# Altium PCB control.PcbDoc
Units mil, origin at the board's own origin, x right, y up, seen from the top; angles counter-clockwise.
Board outline 3832.2 x 2347 mil, 2 copper layers (Top Layer, Bottom Layer); 91 components, 66 nets, 337 pads, 189 vias.
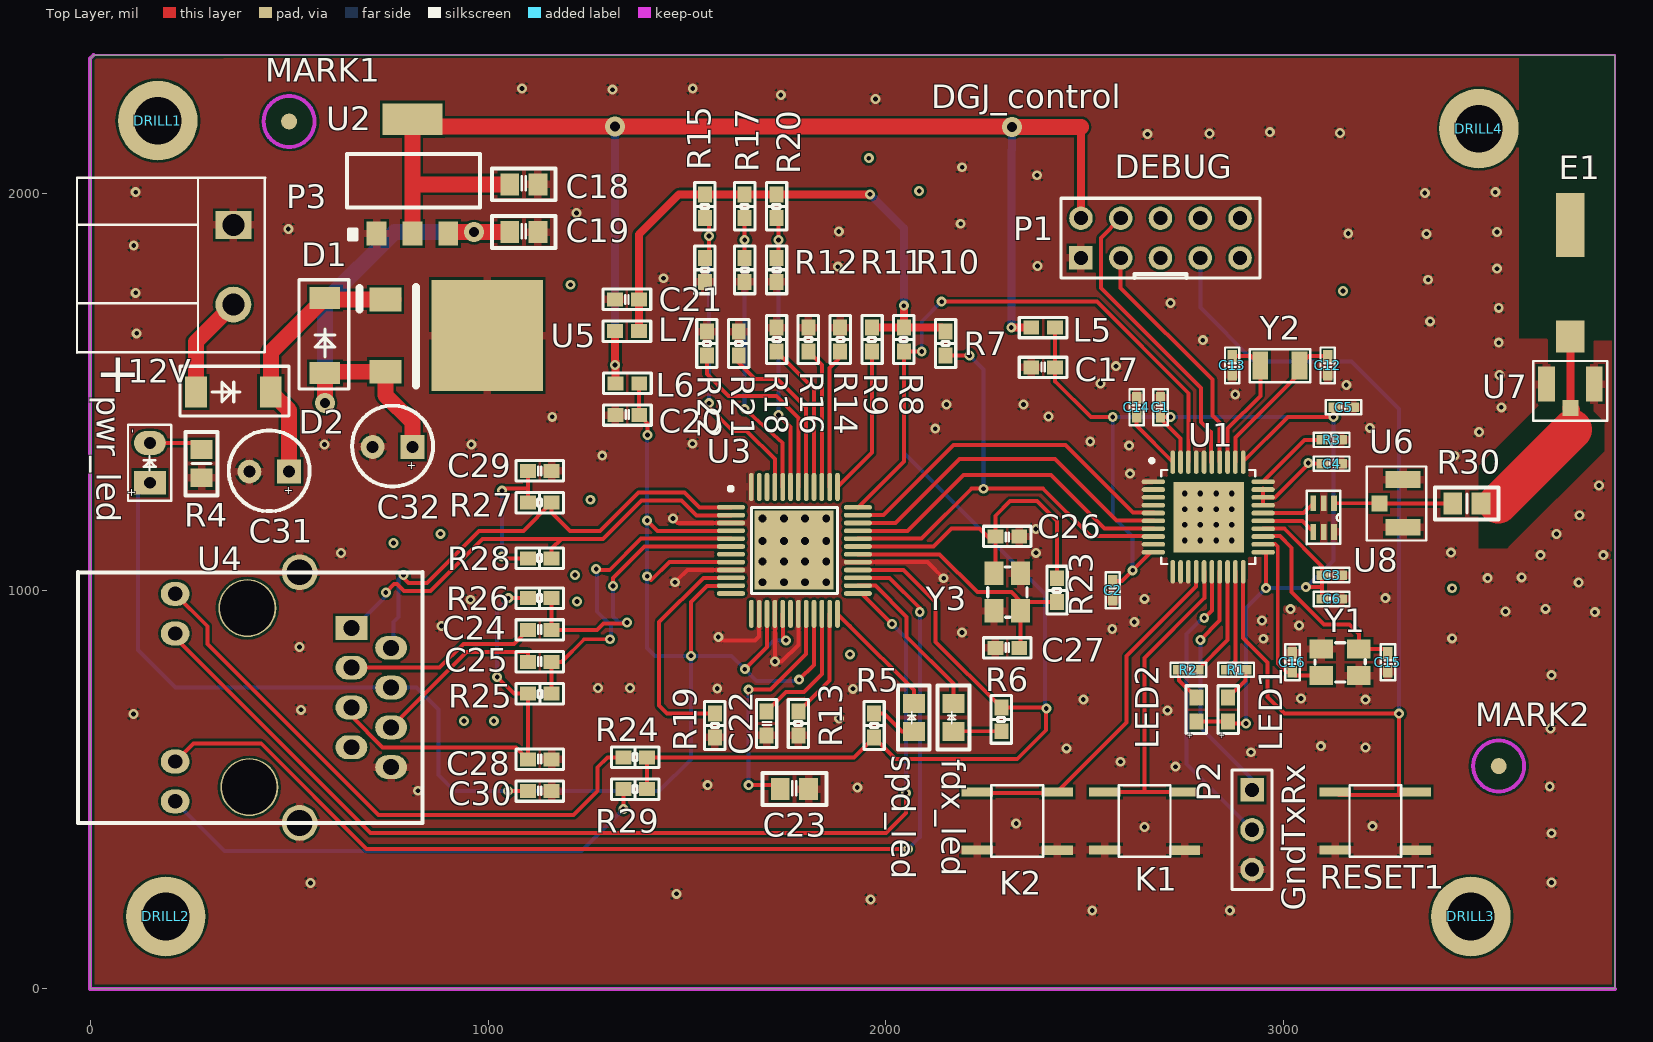
[diagram p0: Top Layer view]
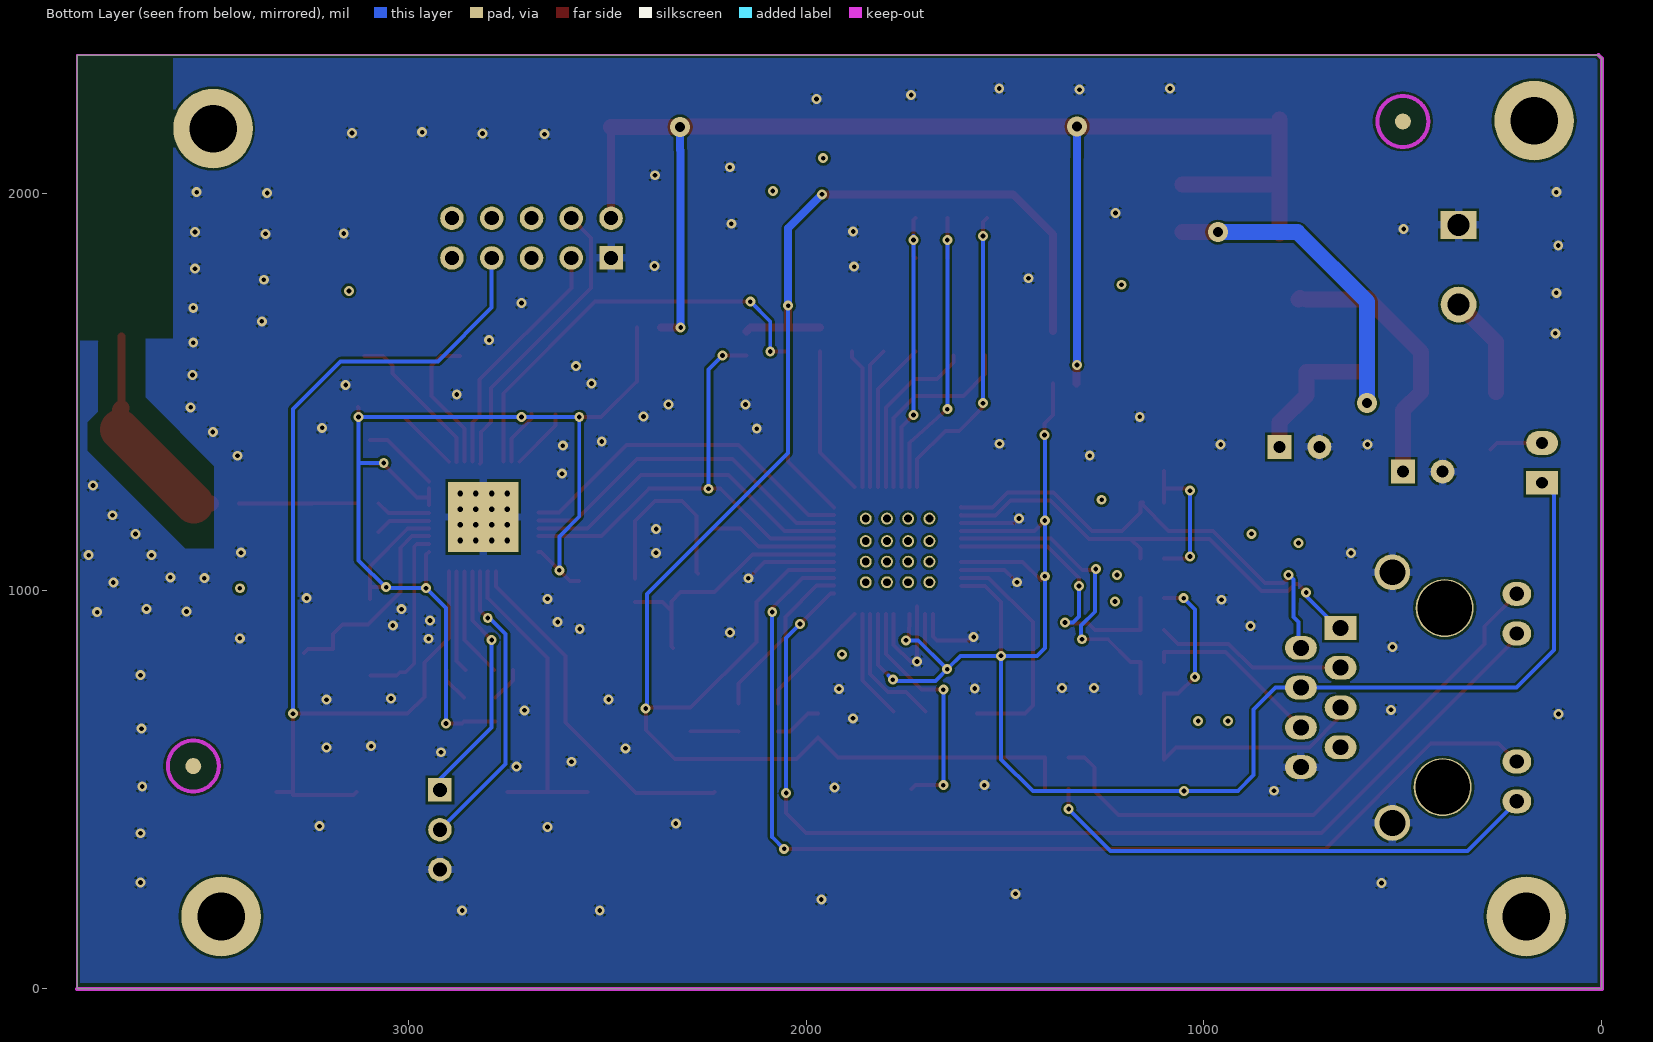
[diagram p1: Bottom Layer view, seen from below]

## Layer stack, top to bottom
Top Layer: signal copper 1.4
Dielectric: dielectric 12.6, FR-4, Dk 4.8
Bottom Layer: signal copper 1.4

## Board outline
3832.2,0 0,0 0,2338 9,2347 3832.2,2347

## Design rules (kind name [scope] priority, off if disabled: settings)
Clearance [All] p1: gap=6
DiffPairsRouting [All] p1: maxlimit=10 minlimit=10 mostfreqgap=10 maxuncoupledlength=100
HoleToHoleClearance [All] p1: gap=20 allowstackedmicrovias=TRUE
PlaneConnect [All] p1: planeconnectstyle=Relief reliefexpansion=20 reliefentries=4 reliefconductorwidth=20 reliefairgap=20
PolygonConnect [All] p1: connectstyle=Relief reliefconductorwidth=20 reliefentries=4 polygonreliefangle="90 Angle"
RoutingVias [All] p1: holewidth=12 width=25 viastyle="Through Hole" minholewidth=12 minwidth=25 maxholewidth=25 maxwidth=50
SilkscreenOverComponentPads [All] p1: minsilkscreentomaskgap=10
SolderMaskExpansion [All] p1: expansion=4
Width [All] p1: maxlimit=100 minlimit=10 preferedwidth=10
24 further rules are at their usual default settings.

## Classes and differential pairs
component class U_control: C1 C2 C3 C4 C5 C6 C12 C13 C14 C15 C16 C17 C18 C19 C31 C32 D1 D2 DRILL1 DRILL2 DRILL3 DRILL4 E1 K1 K2 L5 LED1 LED2 MARK1 MARK2 P1 P2 P3 R1 R2 R3 R30 RESET1 U1 U2 U5 U6 U7 U8 Y1 Y2
component class U_w5500: C20 C21 C22 C23 C24 C25 C26 C27 C28 C29 C30 fdx_led L6 L7 pwr_led R4 R5 R6 R7 R8 R9 R10 R11 R12 R13 R14 R15 R16 R17 R18 R19 R20 R21 R22 R23 R24 R25 R26 R27 R28 R29 spd_led U3 U4 Y3
differential pair TXO: +TXO_P -TXO_N
differential pair RF1: +RF1_P -RF1_N
differential pair RXI: +RXI_P -RXI_N
differential pair RD: +RD_P -RD_N

## Components (designator, comment, footprint, x,y, rotation, side; value= is the part's Value field where it differs from the comment)
C1 "0.1uF,0402" C0402 2690,1462 r270 top
C2 "0.1uF,0402" C0402 2570,1002 r90 top
C3 "0.1uF,0402" C0402 3120,1040 r180 top
C4 "0.1uF,0402" C0402 3120,1320 r180 top
C5 "220pF,0402" C0402 3150,1462 r180 top
C6 "0.1uF,0402" C0402 3120,980 r0 top
C12 "15pF,0402" C0402 3110,1567 r90 top
C13 "15pF,0402" C0402 2870,1567 r90 top
C14 "0.1uF,0402" C0402 2630,1462 r270 top
C15 "27pF,0402" C0402 3261.6,820.8 r90 top
C16 "27pF,0402" C0402 3021.6,820.8 r270 top
C17 "0.1uF,0603" C0603 2395,1562 r180 top
C18 "1uF,0805" C0805 1090,2022 r180 top
C19 "1uF,0805" C0805 1090,1902 r180 top
C20 "0.1uF,0603" C0603 1350,1442 r180 top
C21 "0.1uF,0603" C0603 1349,1733 r0 top
C22 "10nF,0603" C0603 1700,667 r90 top
C23 "4.7uF,0805" C0805 1770,502 r180 top
C24 "0.1uF,0603" C0603 1130,902 r180 top
C25 "0.1uF,0603" C0603 1130,822 r180 top
C26 "20pF,0603" C0603 2305,1137 r0 top
C27 "20pF,0603" C0603 2305,857 r180 top
C28 "0.1uF,0603" C0603 1130,577 r180 top
C29 "0.1uF,0603" C0603 1130,1302 r0 top
C30 "0.1uF,0603" C0603 1130,497 r180 top
C31 "220uF" CDIP2 500,1300 r180 top
C32 "220uF" CDIP2 810,1362 r180 top
D1 "M7" DO214AC 590,1642 r90 top
D2 "M7" DO214AC 360,1500 r0 top
DRILL1 "DRILL" DRILL_3MM 170,2182 r90 top
DRILL2 "DRILL" DRILL_3MM 190,182 r90 top
DRILL3 "DRILL" DRILL_3MM 3470,182 r90 top
DRILL4 "DRILL" DRILL_3MM 3490,2162 r90 top
E1 "2450AT42A100" BT_ANT_PCB 3720,1640 r90 top
fdx_led "0603_SMD" LED0805 2170,682 r90 top
K1 "KEY_SMT_4PIN" KEY-SMT 2650,422 r0 top
K2 "KEY_SMT_4PIN" KEY-SMT 2330,422 r0 top
L5 "1uH,0603" L0603 2395,1662 r0 top
L6 "1uH,0603" L0603 1350,1522 r0 top
L7 "1uH,0603" L0603 1349,1653 r0 top
LED1 "0603_SMD" LED0603 2860,702 r90 top
LED2 "0603_SMD" LED0603 2780,702 r90 top
MARK1 "MARK POINT" MARK_POINT 500,2180 r90 top
MARK2 "MARK POINT" MARK_POINT 3540,560 r90 top
P1 "DEBUG" HDR2X5 2690,1887 r90 top
P2 "GndTxRx" HDR1X3 2920,500 r270 top
P3 "12V" 2EDG-5.08-2P 360,1920 r270 top
pwr_led "DIP2" LEDDIP2 150,1322 r90 top
R1 "1k,0402" R0402 2880,802 r180 top
R2 "1k,0402" R0402 2760,802 r0 top
R3 "56k,0402" R0402 3120,1380 r180 top
R4 "1k,0805" R0805 280,1320 r270 top
R5 "510,0603" R0603 1970,662 r90 top
R6 "510,0603" R0603 2290,677.43 r270 top
R7 "10k,0603" R0603 2150,1622 r270 top
R8 "10k,0603" R0603 2045,1632 r270 top
R9 "10k,0603" R0603 1965,1632 r270 top
R10 "10k,0603" R0603 1725,1807 r90 top
R11 "10k,0603" R0603 1645,1807 r90 top
R12 "10k,0603" R0603 1545,1807 r90 top
R13 "10k,0603" R0603 1780,667 r270 top
R14 "10k,0603" R0603 1885,1632 r90 top
R15 "10k,0603" R0603 1545,1967 r270 top
R16 "10k,0603" R0603 1805,1632 r90 top
R17 "10k,0603" R0603 1645,1967 r270 top
R18 "10k,0603" R0603 1725,1632 r90 top
R19 "12.4k1%,0603" R0603 1570,662 r90 top
R20 "10k,0603" R0603 1725,1967 r270 top
R21 "10k,0603" R0603 1630,1622 r90 top
R22 "10k,0603" R0603 1550,1622 r90 top
R23 "1M,0603" R0603 2430,1002 r270 top
R24 "510,0603" R0603 1370,582 r180 top
R25 "49.9,0603" R0603 1130,742 r0 top
R26 "49.9,0603" R0603 1130,982 r180 top
R27 "49.9,0603" R0603 1130,1222 r180 top
R28 "49.9,0603" R0603 1130,1082 r180 top
R29 "510,0603" R0603 1370,502 r180 top
R30 "56k,0402" R0805 3460,1220 r0 top
RESET1 "KEY_SMT_4PIN" KEY-SMT 3230,422 r0 top
spd_led "0603_SMD" LED0805 2070,682 r90 top
U1 "CC2541F256" PQFP40 2810,1186 r0 top
U2 "AMS117-3.3V" SOT223 810,2042 r0 top
U3 "W5500" LQFP48 1770,1102 r0 top
U4 "RJ45,HR911105A" RJ45 485,732 r180 top
U5 "LM7805" SOT252 870,1642 r270 top
U6 "ipex" IPEX 3300,1280 r0 top
U7 "IPEX" IPEX 3660,1520 r90 top
U8 "2450BM15A002" 2450BM15A002 3100,1184.5 r270 top
Y1 "32.000MHz/SX-32" 3225 3141.6,820.8 r0 top
Y2 "32.768kHz" 1206 2990,1567 r0 top
Y3 "25.000MHz/SX-32" 3225 2305,997 r270 top

## Footprints (in the part's own frame and the unit in brackets; to place one, negate y for a bottom-side part, rotate by r counter-clockwise, add the part's x,y. Pads: shape width x height; smd on the part's side, far side on the other; paste and mask are expansions set on the pad)
2EDG-5.08-2P [mil]
  rect 70x90 hole 55: 1(0,0)
  round 90 hole 55: 2(200,0)
  silkscreen extent -119,-393 321,80
1206 [mm]
  rect 1x1.8 smd: 1(-1.25,0) 2(1.25,0)
  silkscreen extent -1.93,-1.07 1.93,1.04
2450BM15A002 [mil]
  rect 40x14 smd: 1(-36,26) 2(-36,0) 3(-36,-26) 4(36,-26) 5(36,0) 6(36,26)
  silkscreen extent -67,-42 67,42
3225 [mm]
  rect 1.5x1.2 smd: 1(-1.2,-0.85) 2(1.2,-0.85) 3(1.2,0.85) 4(-1.2,0.85)
  silkscreen extent -1.6,-1.25 1.6,1.25
BT_ANT_PCB [mil]
  rect 80x72 smd: 1(0,0)
  rect 160x72 smd: 2(280,0)
C0402 [mm]
  rect 0.75x0.6 smd: 1(-0.6,0) 2(0.6,0)
  silkscreen extent -1.14,-0.46 1.14,0.46
C0603 [mil]
  rect 40x35 smd: 1(-29.92,0) 2(29.92,0)
  silkscreen extent -60,-26 60,26
C0805 [mm]
  rect 1.2x1.4 smd: 1(-0.9,0) 2(0.9,0)
  silkscreen extent -2.03,-1.02 2.03,1.02
CDIP2 [mil]
  rect 60x60 hole 30: 1(0,0)
  round 60 hole 30: 2(100,0)
  silkscreen extent -52,-104 152,100
DO214AC [mil]
  rect 55x77 smd: 1(-94,0) 2(94,0)
  silkscreen extent -134,-60 140,65
DRILL_3MM [mil]
  round 200 hole 120: 1(0,0)
HDR1X3 [mm] "Connector; Header; 3 Position"
  rect 1.5x1.5 hole 0.9: 1(0,0)
  round 1.5 hole 0.9: 2(2.54,0) 3(5.08,0)
  silkscreen extent -1.27,-1.27 6.35,1.27
HDR2X5 [mm]
  rect 1.5x1.5 hole 0.9: 1(-1.27,5.08)
  round 1.5 hole 0.9: 2(1.27,5.08) 3(-1.27,2.54) 4(1.27,2.54) 5(-1.27,0) 6(1.27,0) 7(-1.27,-2.54) 8(1.27,-2.54) 9(-1.27,-5.08) 10(1.27,-5.08)
  silkscreen extent -2.54,-6.35 2.54,6.35
IPEX [mil]
  rect 40x40 smd: 1(-60,-60)
  rect 88x42 smd: 2(0,-120) 3(0,0)
  silkscreen extent -92,-153 58,33
KEY-SMT [mm]
  rect 2x0.6 smd: 1(-2.55,-1.85) 1(2.55,-1.87) 2(-2.55,1.85) 2(2.55,1.85)
  silkscreen extent -1.65,-2.29 1.65,2.29
L0603 [mil]
  rect 40x35 smd: 1(-29.92,0) 2(29.92,0)
  silkscreen extent -60,-26 60,26
LED0603 [mil]
  rect 40x35 smd: 1(-29.92,0) 2(29.92,0)
  silkscreen extent -60,-26 60,26
LED0805 [mm]
  rect 1.2x1.4 smd: 1(-0.9,0) 2(0.9,0)
  silkscreen extent -2.03,-1.02 2.03,1.02
LEDDIP2 [mil]
  rect 60x80 hole 30: 1(-50,0)
  oval 60x80 hole 30: 2(50,0)
  silkscreen extent -95,-54 96,55
LQFP48 [mm]
  oval 1.8x0.3 smd: 1(-4.05,2.75) 2(-4.05,2.25) 3(-4.05,1.75) 4(-4.05,1.25) 5(-4.05,0.75) 6(-4.05,0.25) 7(-4.05,-0.25) 8(-4.05,-0.75) 9(-4.05,-1.25) 10(-4.05,-1.75) 11(-4.05,-2.25) 12(-4.05,-2.75) 25(4.05,-2.75) 26(4.05,-2.25) 27(4.05,-1.75) 28(4.05,-1.25) 29(4.05,-0.75) 30(4.05,-0.25) 31(4.05,0.25) 32(4.05,0.75) 33(4.05,1.25) 34(4.05,1.75) 35(4.05,2.25) 36(4.05,2.75)
  oval 0.3x1.8 smd: 13(-2.75,-4.05) 14(-2.25,-4.05) 15(-1.75,-4.05) 16(-1.25,-4.05) 17(-0.75,-4.05) 18(-0.25,-4.05) 19(0.25,-4.05) 20(0.75,-4.05) 21(1.25,-4.05) 22(1.75,-4.05) 23(2.25,-4.05) 24(2.75,-4.05) 37(2.75,4.05) 38(2.25,4.05) 39(1.75,4.05) 40(1.25,4.05) 41(0.75,4.05) 42(0.25,4.05) 43(-0.25,4.05) 44(-0.75,4.05) 45(-1.25,4.05) 46(-1.75,4.05) 47(-2.25,4.05) 48(-2.75,4.05)
  round 0.762 hole 0.508: 49(-2.032,-2.032) 49(-2.032,-0.72) 49(-2.032,0.593) 49(-2.032,2.032) 49(-0.677,-2.032) 49(-0.677,-0.72) 49(-0.677,0.593) 49(-0.677,2.032) 49(0.677,-2.032) 49(0.677,-0.72) 49(0.677,0.593) 49(0.677,2.032) 49(2.032,-2.032) 49(2.032,-0.72) 49(2.032,0.593) 49(2.032,2.032)
  rect 5.06x5.06 smd: 49(-0.025,0.025)
  silkscreen extent -4.19,-2.75 2.75,4.06
MARK_POINT [mil]
  round 40 all layers, no hole paste+40 mask+40: 1(0,0)
  Keep-Out Layer circle w10: c0,0 r64.03
PQFP40 [mm]
  oval 1.5x0.3 smd paste+0 mask+0.051: 1(-3.5,2.25) 2(-3.5,1.75) 3(-3.5,1.25) 4(-3.5,0.75) 5(-3.5,0.25) 6(-3.5,-0.25) 7(-3.5,-0.75) 8(-3.5,-1.25) 9(-3.5,-1.75) 10(-3.5,-2.25) 21(3.5,-2.25) 22(3.5,-1.75) 23(3.5,-1.25) 24(3.5,-0.75) 25(3.5,-0.25) 26(3.5,0.25) 27(3.5,0.75) 28(3.5,1.25) 29(3.5,1.75) 30(3.5,2.25)
  oval 0.3x1.5 smd paste+0 mask+0.051: 11(-2.268,-3.5) 12(-1.768,-3.5) 13(-1.268,-3.5) 14(-0.768,-3.5) 15(-0.268,-3.5) 16(0.232,-3.5) 17(0.732,-3.5) 18(1.232,-3.5) 19(1.732,-3.5) 20(2.232,-3.5) 31(2.232,3.5) 32(1.732,3.5) 33(1.232,3.5) 34(0.732,3.5) 35(0.232,3.5) 36(-0.268,3.5) 37(-0.768,3.5) 38(-1.268,3.5) 39(-1.768,3.5) 40(-2.268,3.5)
  rect 0.762x0.762 hole 0.356 paste+0 mask+0: 41(-1.5,-1.5) 41(-1.5,-0.5) 41(-1.5,0.5) 41(-1.5,1.5) 41(-0.5,-1.5) 41(-0.5,-0.508) 41(-0.5,0.5) 41(-0.5,1.5) 41(0.516,-1.5) 41(0.516,-0.508) 41(0.516,0.5) 41(0.516,1.5) 41(1.5,-1.5) 41(1.5,-0.508) 41(1.5,0.5) 41(1.5,1.5)
  rect 4.5x4.5 smd paste+0 mask+0: 41(0.024,-0.024)
  rect 4.496x4.496 smd far side: 41(0.025,0)
  silkscreen extent -3.71,-3 3,3.71
R0402 [mm]
  rect 0.75x0.6 smd: 1(-0.6,0) 2(0.6,0)
  silkscreen extent -1.14,-0.46 1.14,0.46
R0603 [mil]
  rect 40x35 smd: 1(-29.92,0) 2(29.92,0)
  silkscreen extent -60,-26 60,26
R0805 [mm] "Chip Resistor, Body 2.0x1.2mm, IPC Medium Density"
  rect 1.2x1.4 smd: 1(-0.9,0) 2(0.9,0)
  silkscreen extent -2.03,-1.02 2.03,1.02
RJ45 [mil]
  round 145.67 hole 137.8: 0(85,225) 0(90,-225)
  rect 80x60 hole 40: 1(-171.46,-175.2)
  oval 80x60 hole 40: 2(-271.46,-125.2) 3(-171.46,-75.2) 4(-271.46,-25.2) 5(-171.46,24.8) 6(-271.46,74.8) 7(-171.46,124.8) 8(-271.46,174.8)
  oval 72x60 hole 36: 9(271.46,-260.83) 10(271.46,-161.2) 11(271.46,160.67) 12(271.46,260.8)
  round 90 hole 65: 13(-41.54,314.96) 13(-41.54,-314.96)
  silkscreen extent -350,-315 516,315
SOT223 [mil]
  rect 50x60 smd: 1(-90,-143.5) 2(0,-143.5) 3(90,-143.5)
  rect 150x80 smd: 2(0,143.5)
  silkscreen extent -165,-158 170,56
SOT252 [mil]
  rect 60x80 smd: 1(-91,-128) 3(91,-128)
  rect 280x280 smd: 2(0,128)
  silkscreen extent -122,-193 126,-51

## Part data
C1 C2 C3 C4 C5 C6 C12 C13 C14 C15 C16 C17 C18 C19 C20 C21 C22 C23 C24 C25 C26 C27 C28 C29 C30: library part CAP, "Capacitor"
C31 C32: library part E_CAP, "electric capacitor"
D1 D2: library part DIODE, "diode"
E1: library part BT_ANT_PCB
fdx_led LED1 LED2 spd_led: library part LED, "led"
K1 K2 RESET1: library part KEY, "key"
L5 L6 L7: library part Inductor, "Inductor"
MARK1 MARK2: library part MARK_POINT
P1: library part "Header 5X2", "Header, 5-Pin, Dual row"
P2: library part "Header 3", "Header, 3-Pin"
P3: library part 2EDG-5.08-2P
pwr_led: library part LED
R1 R2 R3 R4 R5 R6 R7 R8 R9 R10 R11 R12 R13 R14 R15 R16 R17 R18 R19 R20 R21 R22 R23 R24 R25 R26 R27 R28 R29 R30: library part Res1, "Resistor"
U1: library part CC254x, "TI cc2541F256"
U2 U5: library part VOLT_REG, "voltage regulator tube"
U4: library part HR911105A
U6: library part IPEX
Y1: library part CRYSTAL_5, "SPXO"
Y2: library part DA740C, "crystal"
Y3: library part CRYSTAL_5

## Via types
v1: diameter 25, hole 12, Top Layer to Bottom Layer, 185 vias
v2: diameter 50, hole 25, Top Layer to Bottom Layer, 4 vias

## Nets (pads, with @x,y where several pads share a name; then routed paths per layer and width w, separated by ;. In a path a pad name is that pad's centre, name@x,y a point inside that pad or via, vN(x,y) a via of type N, cw(c..) or ccw(c..) an arc to the next point about the centre after c; other vN are vias at no path point)
ACT_LED: U3.27 U4.11 | length 2774.6
  Top Layer w10: U4.11 259.21,617 430,617 695,352 v1(2055,352) ; U3.27 2008.9,1033.1 2085,957 v1(2085,947)
  Bottom Layer w10: v1(2055,352) 2085,382 v1(2085,947)
DC: P1.3 U1.34 | length 615.3
  Top Layer w10: P1.3 2590,1762 2820.8,1531.2 2820.8,1441.2 2838.81,1423.18 U1.34@2838.81,1324.8
DD: P1.4 U1.35 | length 753.5
  Top Layer w10: P1.4 2540,1887 2540,1762 2792,1510 2792,1424.3 2816.34,1399.96 2816.34,1322.58 U1.35@2819.13,1319.8
FDX_LED: fdx_led.2 U3.26 | length 421.5
  Top Layer w10: U3.26 1973.58,1013.42 2052,935 2052,885 2170,767 fdx_led.2
GND: C1.1 C2.1 C3.1 C4.1 C5.1 C6.2 C12.1 C13.1 C14.1 C15.1 C16.1 C17.2 C18.1 C19.1 C20.2 C21.1 C22.1 C23.1 C26.2 C27.2 C28.1 C29.2 C30.1 C31.2 C32.2 K1.1 K2.1 P1.1 P2.3 P3.1 R3.1 R4.2 R10.1 R11.1 R12.1 R13.2 R14.2 R16.2 R18.2 R19.1 R21.2 R22.2 RESET1.1 U1.1 U1.41 U2.1 U3.3 U3.9 U3.14 U3.16 U3.19 U3.29 U3.48 U4.8 U4.13 U5.2 U6.2 U6.3 U7.2 U7.3 U8.2 U8.5 U8.6 Y1.2 Y1.4 Y3.2 Y3.4 | length 995.4
  Top Layer w10: v1(1465,1182) 1476.1,1170.9 U3.3 ; v1@1475,1017 1475,1027 1500.79,1052.79 U3.9 ; v1(1578.8,884.4) 1587.5,875.7 1671.2,875.7 1681.42,885.92 U3.14 ; v1@1720.79,824.79 U3.16@1720.79,960.55 ; v1(1721,823) 1738,823 1779.84,864.84 U3.19 ; U3.29 2104.53,1072.47 v1(2145,1032)
  other v1: 2518.5,197.2 2864.2,197.2 1961.7,224.6 1473.7,239 554,266 3672.6,267.1 3672.6,391.1 2650,407 3223,409 2327.4,415.9 824,498 1928,506 3668.3,508.6 1552,512 2727.8,558.5 2589.2,570.8 2917.6,594.7 2453.7,604.7 3205.3,606.5 3093,610 3670.4,653.9 1882,680 108.9,691 2707.8,700.2 529.6,701.4 2496,727 3205.2,726.9 3043.2,729.8 1917.1,754.2 1576,755 1276.6,755.9 1357,756 3672.6,788.5 526,859 2948.4,880 3423,881 2191,896 2568.8,904.6 883.3,911.7 3038.5,913.2 2624.3,921.9 2945.2,925.8 3781.6,946.7 3557.2,948.8 3016.4,954.3 3657.6,955.2 956,978 2649.6,980.4 3255,982 1470,1022 3741,1021.5 3512.3,1032.2 3597.8,1034.3 3644.8,1089.9 3802.9,1089.9 630.5,1095.4 2377,1096 3420.4,1096.3 3685.4,1143.3 2376.6,1155.6 3743.1,1190.3 3792.2,1265.1 2613.3,1294.8 1287,1340 3429,1339.9 2611.2,1365.3 589,1368 958,1368 1514,1370 2513.4,1375.8 3490.9,1399.7 2123.9,1408 3216,1410 1161.3,1437.7 2408.3,1438.6 3546.5,1461.7 2152,1469 2346,1469 2877.9,1493.6 3157,1518 2539.5,1521.5 3542.2,1542.9 2578,1565 3540.1,1624.1 2796.4,1630.3 117,1647.6 3367.8,1677.7 3540.1,1711.7 2715.4,1724 114.5,1749.3 3362.7,1782.2 1441,1786 3535.8,1810 1879,1815 2380.8,1816.6 109.6,1868.3 3161.8,1898.2 3358.4,1897.6 3535.8,1901.9 1881.6,1903.3 498,1910 2187.8,1923 1222.4,1950.2 3354.2,2000.2 114.5,2002.3 3531.5,2002.4 2379.8,2044.9 2191.5,2064.9 2657.5,2148 2813.2,2150.1 3141.4,2151.1 2964.7,2153.2 1973.4,2236.7 1735.7,2246.6 1313.1,2259.8 1085.3,2263.1 1514.5,2263.1
INT: R8.2 U1.38 U3.36 | length 1517.9
  Top Layer w10: U3.36 2045,1325.82 R8.2 2070.08,1602.08 2070.16,1602 v1(2090,1602) ; v1(2140,1727) 2530,1727 2760.07,1496.93 U1.38@2760.07,1324.8
  Bottom Layer w10: v1(2090,1602) 2090,1677 v1(2140,1727)
KEY1: K1.2 U1.15 | length 818.4
  Top Layer w10: K1.2@2549.61,494.83 2647.83,494.83 ; K1.2@2750.39,494.83 2647.83,494.83 ; U1.15@2799.44,1049.2 2800,1048.65 2800,982 2650,832 2650,497 2647.83,494.83
KEY2: K2.2 U1.14 | length 906.2
  Top Layer w10: K2.2@2229.61,494.83 2232.44,492 K2.2@2427.56,492 ; U1.14@2779.76,1049.2 2779.76,1011.76 2605,837 2605,669.44 K2.2@2430.39,494.83 ; K2.2@2427.56,492 K2.2@2430.39,494.83 ; K2.2@2427.56,492 K2.2@2430.39,494.83
LED1: R1.2 U1.19 | length 272.9
  Top Layer w10: R1.2@2868.19,813.81 R1.2 2878.19,823.81 U1.19@2878.19,1049.2
LED2: R2.2 U1.18 | length 278.2
  Top Layer w10: R2.2 2858.5,876.88 U1.18@2858.5,1049.2
LINK_LED: U3.25 U4.10 | length 2677.3
  Top Layer w10: U4.10 213.54,883.46 705,392 2000,392 2050,442 v1(2050,492) ; U3.25 1938.27,993.73 v1(2015,917)
  Bottom Layer w10: v1(2015,917) 2050,882 v1(2050,492)
MISO: U1.6 U3.34 | length 873.6
  Top Layer w10: U3.34 2023.9,1170.9 2185,1332 2425,1332 2579.84,1177.16 U1.6@2672.2,1177.16
MOSI: U1.5 U3.35 | length 920.1
  Top Layer w10: U3.35@1963.2,1190.58 U3.35 1993.58,1190.58 2170,1367 2451.16,1367 2621.31,1196.84 U1.5@2672.2,1196.84
NetC12_2: C12.2 U1.32 Y2.2 | length 390.5
  Top Layer w10: U1.32 2878.19,1385.59 3039.21,1546.61 Y2.2 3062.83,1590.62 C12.2
NetC13_2: C13.2 U1.33 Y2.1 | length 356.9
  Top Layer w10: U1.33@2858.5,1324.8 2858.5,1408.3 2940.79,1490.59 Y2.1 2917.17,1590.62 C13.2
NetC14_2: C14.2 U1.40 | length 156.2
  Top Layer w10: C14.2@2630,1443.38 2630,1415.5 U1.40@2720.7,1324.8
NetC15_2: C15.2 U1.23 Y1.3 | length 522.6
  Top Layer w10: U1.23@2947.8,1137.79 2990.21,1137.79 3019.3,1108.7 3019.3,997.2 3100.8,915.7 3164.9,915.7 3188.84,891.76 Y1.3 3251.76,854.26 C15.2
NetC16_2: C16.2 U1.22 Y1.1 | length 455.8
  Top Layer w10: U1.22@2947.8,1118.1 2978.3,1118.1 2984.7,1111.7 2984.7,817.7 3006.6,795.8 3020.22,795.8 3028.69,787.34 Y1.1
NetC22_2: C22.2 U3.22 | length 329.5
  Top Layer w10: C22.2 1749.08,746 1794,746 1838.9,790.9 U3.22
NetC23_2: C23.2 U3.20 | length 621.3
  Top Layer w10: v1(1655,512) 1724.57,512 C23.2 ; v1@1655,742 v1(1655,752) 1710,752 1799.53,841.53 U3.20
  Bottom Layer w10: v1@1655,507 v1(1655,512) v1(1655,752)
NetC29_1: C29.1 R27.2 R28.2 | length 372.2
  Top Layer w10: v1(1035,1087) 1040,1082 R28.2 ; v1@1040,1257 1100.08,1257 ; R27.2 1100.08,1257 ; C29.1 1100.08,1257
  Bottom Layer w10: v1(1035,1087) v1(1035,1252)
NetC31_1: C31.1 D1.2 D2.2 U5.1 | length 668.9
  Top Layer w40: C31.1 500,1454 D2.2 454,1600 D1.2 593,1733 U5.1 ; U5.1@759,1736 U5.1@762,1733
NetD2_1: D2.1 P3.2 | length 258.9
  Top Layer w40: D2.1 266,1626 P3.2
NetE1_1: E1.1 R30.2 U7.1 | length 542.3
  Top Layer w20: U7.1 E1.1
  Top Layer w40: R30.2 3538.9,1220 ; U7.1 3724.6,1455.4 3724.6,1405.7
  Top Layer w100: 3538.9,1220 3724.6,1405.7
Netfdx_led_1: fdx_led.1 R6.2 | length 120.4
  Top Layer w10: fdx_led.1 2170.94,647.51 R6.2
NetLED1_2: LED1.2 R1.1 | length 88.1
  Top Layer w10: LED1.2 2903.62,775.54 R1.1
NetLED2_2: LED2.2 R2.1 | length 88.1
  Top Layer w10: R2.1 2736.38,775.54 LED2.2
Netpwr_led_2: pwr_led.2 R4.1 | length 136.9
  Top Layer w10: pwr_led.2 263.43,1372 R4.1
NetR3_2: R3.2 U1.30 | length 191.8
  Top Layer w10: U1.30@2947.8,1275.58 3052.21,1380 R3.2
NetR5_2: R5.2 spd_led.1 | length 118.8
  Top Layer w10: R5.2 1995.08,691.92 2040.43,646.57 spd_led.1
NetR10_2: R10.2 R20.2 U3.43 | length 747.3
  Top Layer w10: R10.2 1730,1841.92 v1(1730,1882) 1730,1932.08 R20.2 ; v1(1730,1442) 1760.16,1411.84 U3.43
  Bottom Layer w10: v1(1730,1442) v1(1730,1882) v1@1730,1892
NetR11_2: R11.2 R17.2 U3.44 | length 758.4
  Top Layer w10: v1(1645,1457) 1740.47,1371.53 U3.44 ; R11.2 v1(1645,1882) R17.2
  Bottom Layer w10: v1(1645,1457) v1@1645,1877
NetR12_2: R12.2 R15.2 U3.45 | length 814
  Top Layer w10: R15.2 1555,1927.08 v1(1555,1892) R12.2@1555,1846.92 ; v1(1555,1472) 1555,1462 1615,1402 1650,1402 1720.79,1331.21 U3.45
  Bottom Layer w10: v1(1555,1472) v1(1555,1892)
NetR13_1: R13.1 U3.23 | length 278.2
  Top Layer w10: R13.1 1858.58,775.5 U3.23
NetR14_1: R14.1 U3.38 | length 351.6
  Top Layer w10: U3.38 1858.58,1560.58 1885,1587 R14.1
NetR16_1: R16.1 U3.39 | length 354.7
  Top Layer w10: R16.1 1838.9,1568.18 U3.39
NetR18_1: R18.1 U3.40 | length 379.7
  Top Layer w10: R18.1 1819.21,1507.87 U3.40
NetR19_2: R19.2 U3.10 | length 584.9
  Top Layer w10: R19.2 1450.08,691.92 1430,712 1430,922 1541.1,1033.1 U3.10
NetR21_1: R21.1 U3.41 | length 434.2
  Top Layer w10: R21.1 1630,1574 1671,1533 1728,1533 1799.53,1461.47 U3.41
NetR22_1: R22.1 U3.42 | length 496.1
  Top Layer w10: R22.1 1550,1545 1604.5,1490.5 1724.5,1490.5 1779.84,1435.16 U3.42
NetR24_2: R24.2 U4.9 | length 1478
  Top Layer w10: U4.9 295,911.37 295,867 725,437 1215,437 1275,497 1275,557 1300,582 R24.2
NetR29_2: R29.2 U4.12 | length 1271.4
  Top Layer w10: v1(1340,452) 1340.08,452.08 R29.2
  Bottom Layer w10: U4.12 337.74,347 1235,347 v1(1340,452)
NetR30_1: R30.1 U6.1 U8.1 | length 298.8
  Top Layer w10: U8.1 3239.5,1220.5 U6.1 R30.1
RD_N: C25.2 U4.6 | length 447.2
  Top Layer w10: U4.6 946.26,847 1100.08,847 C25.2
RD_P: C24.2 U4.3 | length 482.9
  Top Layer w10: U4.3 878.17,807.2 937.98,867 1065.08,867 C24.2
RESET: P1.7 RESET1.2 U1.20 | length 2585.1
  Top Layer w10: U1.20@2897.87,1049.2 U1.20 2897.87,881.43 2959.4,819.9 2959.4,733.8 3001.59,691.61 v1(3289.61,691.61) 3289.61,487.39 3137.05,487.39 RESET1.2@3129.61,494.83 ; RESET1.2@3297.05,494.83 RESET1.2@3330.39,494.83
  Bottom Layer w10: P1.7 2790,1712 2925,1577 3170,1577 3289.61,1457.39 v1(3289.61,691.61)
RF1_N: U1.26 U8.3 | length 136.7
  Top Layer w10: U1.26 2982.4,1195.84 2982.24,1196 3049.5,1196 U8.3
RF1_P: U1.25 U8.4 | length 138
  Top Layer w10: U1.25 2982.4,1176.16 2982.24,1176 3046.5,1176 U8.4
RST: R9.2 U3.37 | length 376.6
  Top Layer w10: U3.37 1965,1348.18 R9.2
RX: P2.1 U1.17 | length 623.3
  Top Layer w10: v1(2790,877) 2838.81,925.82 U1.17 U1.17@2838.81,1049.2
  Bottom Layer w10: v1(2790,877) 2790,657 2920,527 P2.1
RXCT: C28.2 R25.1 R26.2 U4.5 | length 1028.4
  Top Layer w10: U4.5 656.46,685.54 735,607 1070.08,607 C28.2 R25.1 1065,742 v1(1023,784) ; v1(1051,982) R26.2
  Bottom Layer w10: v1(1023,784) 1023,954 v1(1051,982)
RXI_N: C25.1 R25.2 U3.5 | length 816.2
  Top Layer w10: R25.2 C25.1 1185,822 1241.72,878.72 v1(1306.72,878.72) ; v1(1271.72,1055.28) 1274.14,1052.86 1305.86,1052.86 1384.84,1131.84 1610.55,1131.84 U3.5
  Bottom Layer w10: v1(1271.72,1055.28) 1274.14,1052.86 1274.14,947.86 1309.14,912.86 1309.14,881.14 v1(1306.72,878.72)
RXI_P: C24.1 R26.1 U3.6 | length 744.2
  Top Layer w10: R26.1 C24.1 1273.43,902 1290.15,918.72 1346.72,918.72 v1(1349.14,921.14) ; v1(1314.14,1012.86) 1314.14,1032.86 1393.13,1111.84 U3.6
  Bottom Layer w10: v1(1314.14,1012.86) 1314.14,936.14 1329.14,921.14 v1(1349.14,921.14)
SCLK: U1.7 U3.33 | length 856.8
  Top Layer w10: U3.33 2054.21,1151.21 2195,1292 2415,1292 2549.53,1157.47 U1.7@2672.2,1157.47
SCS: R7.2 U1.8 U3.32 | length 1253.7
  Top Layer w10: U3.32 2089.53,1131.53 2215,1257 v1(2245,1257) 2395,1257 2514.21,1137.79 U1.8@2672.2,1137.79 ; R7.2 v1(2210.08,1592.08)
  Bottom Layer w10: v1(2210.08,1592.08) 2245,1557.16 v1(2245,1257)
SPD_LED: spd_led.2 U3.24 | length 305.7
  Top Layer w10: U3.24 1908.82,912 ; 1910,912 1908.82,912 ; spd_led.2 2070,750.82 1908.82,912
TX: P2.2 U1.16 | length 756.2
  Top Layer w10: v1@2795,932 v1(2800,932) 2819.13,951.13 U1.16 U1.16@2819.13,1049.2
  Bottom Layer w10: v1@2795,932 v1(2800,932) 2790,927 2755,892 2755,565 P2.2
TXO_N: R27.1 U3.1 U4.2 | length 1224.4
  Top Layer w10: v1(787.3,1040.3) 787.3,1032.8 800.11,1020 846.57,1020 977.72,1151.14 1089.06,1151.14 R27.1 ; R27.1@1153.14,1222 R27.1 ; U3.1@1610.55,1210.58 U3.1 1531.73,1210.27 1494.14,1247.86 1377.57,1247.86 1280.86,1151.14 1205.78,1151.14 1159.92,1197 R27.1
  Bottom Layer w10: U4.2@755,858.65 U4.2 762.5,863.24 762.5,922.15 775.5,935.15 775.5,1003.89 775.5,1028.5 v1(787.3,1040.3)
TXO_P: R28.1 U3.2 U4.1 | length 1186.4
  Top Layer w10: v1(743,996) 764.11,1017.11 771.61,1017.11 788.72,1000 854.86,1000 986,1131.14 1289.14,1131.14 1385.86,1227.86 1485.86,1227.86 1523.45,1190.27 U3.2@1610.55,1190.27 ; R28.1 1159.92,1107 1184.06,1131.14 ; U3.2@1610.55,1190.27 U3.2 U3.2@1610.55,1190.27
  Bottom Layer w10: U4.1 662.7,907.2 748,992.5 744.5,996 v1(743,996)
VCC5V: C19.2 C32.1 D1.1 U2.3 U5.3 | length 1301.7
  Top Layer w40: v2(590,1472) D1.1 590,1551 U5.3 742,1492 810,1424 C32.1 ; U2.3@903.5,1902 v2(965,1902) C19.2
  Bottom Layer w40: v2(590,1472) 590,1727 765,1902 v2(965,1902)
VCC33V: C18.2 L5.1 L6.1 L7.1 P1.2 U2.2 | length 3734.9
  Top Layer w20: v1(1319.08,1568) L7.1 ; L6.1 v1@1320.08,1577 ; v1(2315,1662) L5.1 ; P1.2 2490,2166.1
  Top Layer w40: U2.2@810,1898.5 U2.2@810,2167 ; 810,2022 C18.2 ; U2.2@810,2185.5 U2.2@810,2167 ; 2490,2166.1 v2(2316.3,2166.1) 2315.4,2167 v2(1319,2167) U2.2@810,2167
  Bottom Layer w20: v2(1319,2167) 1319,2088 1319.08,2088.08 v1(1319.08,1568) ; v1(2315,1662) 2315,2107 2316.3,2108.3 v2(2316.3,2166.1)
VCC33V_D: C1.2 C2.2 C3.2 C4.2 C5.2 C6.1 C17.1 L5.2 LED1.1 LED2.1 U1.10 U1.21 U1.24 U1.27 U1.28 U1.29 U1.31 U1.39 | length 3616
  Top Layer w10: L5.2 C17.1 2424.92,1527.08 2515,1437 v1(2570,1437) ; C2.2 2593.62,1025.62 v1(2620,1052) 2666.42,1098.42 U1.10@2672.2,1098.42 ; C1.2@2690,1437 v1(2715,1437) ; C1.2@2690,1445.19 2690,1433.81 2740.39,1383.42 U1.39@2740.39,1324.8 ; LED2.1 LED1.1 2865.08,667 v1(2905,667) ; U1.31@2897.87,1324.8 3010.07,1437 v1(3125,1437) 3125,1460.62 C5.2 ; U1.21@2947.8,1098.42 2955,1091.21 v1(2955,1007) ; U1.24 3001.23,1156.47 3096.38,1061.32 C3.2 3096.38,1011.6 ; U1.27@2947.8,1216.53 U1.28 ; U1.29@2947.8,1257 U1.29 U1.28 ; v1(3055.3,1009.6) 3094.38,1009.6 3096.38,1011.6 ; C6.1 3096.38,1011.6 ; C4.2 3062.8,1320 2978.01,1235.21 U1.28
  Bottom Layer w10: v1(2620,1052) 2620,1137 2570,1187 v1(2570,1437) v1(2715,1437) v1(3125,1437) 3125,1322 ; v1(2905,667) 2905,957 v1(2955,1007) 3055,1007 3125,1077 3125,1322 ; v1(3061.4,1322) 3125,1322
W5500_VCC33V_A: C20.1 C30.2 L6.2 pwr_led.1 U3.4 U3.8 U3.11 U3.15 U3.17 U3.21 U4.4 | length 4783.5
  Top Layer w10: v1(1050,497) C30.2 ; L6.2 C20.1 1401,1420.92 v1(1401,1392) ; v1(1400,1037) 1410,1027 1455.47,1072.47 U3.8 ; v1(1400,1177) 1425.79,1151.21 U3.4 ; v1(1510,837) 1510,972.47 1550,1012.47 U3.11@1609.61,1012.47 ; v1(1645.4,803.4) 1701.1,859.1 U3.15 ; U3.17 1741,876 v1(1749,876) ; v1(1782,777) 1819.21,814.21 U3.21
  Bottom Layer w10: pwr_led.1 120,1242 120,852 214.8,757.2 U4.4 819.8,757.2 875,702 875,537 915,497 v1(1050,497) 1430,497 1510,577 v1(1510,837) ; v1@1399.5,1388 1399.5,1393 1400,1392.5 v1(1400,1177) v1(1400,1037) 1400,857 1420,837 v1(1510,837) ; v1(1749,876) 1718,876 1650.4,808.4 v1@1640.1,808.4 ; 1793,788 v1(1782,777) 1779,774 1674.5,774 v1@1640.1,808.4 ; v1(1510,837) 1611.5,837 v1@1640.1,808.4
W5500_VCC33V_D: C21.2 L7.2 R5.1 R6.1 R7.1 R8.1 R9.1 R15.1 R17.1 R20.1 R24.1 R29.1 U3.28 | length 4472.9
  Top Layer w10: L7.2 L7.2@1380.92,1655 ; R29.1 R24.1 1919.92,582 R5.1 2024.08,578 2330,578 2402,650 v1@2402,704 ; U3.28 2044.21,1052.79 2125,972 2125,872.35 R6.1 2398.65,707.35 v1@2402,704 ; v1(2403,705) v1@2402,704
  Top Layer w20: L7.2 C21.2 1378.92,1895.92 1479.92,1996.92 R15.1 R17.1 R20.1 v1@1959.92,1996.92 ; R9.1 R8.1 ; v1(2045,1717) R8.1 ; R7.1 2140,1661.92 R8.1
  Bottom Layer w10: v1(2045,1717) 2045,1347 2400,992 v1@2400,705
  Bottom Layer w20: v1(1960,1997) 2045,1912 v1(2045,1717)
XI: C27.1 R23.2 U3.30 Y3.3 | length 701.4
  Top Layer w10: U3.30 2134.84,1092.16 2230,997 2315,997 2338.46,973.54 Y3.3 ; C27.1 2338.46,860.54 Y3.3 ; Y3.3@2355.79,967.08 Y3.3 ; R23.2 2360.79,972.08 Y3.3
XO: C26.1 R23.1 U3.31 Y3.1 | length 868.2
  Top Layer w10: U3.31 2119.84,1111.84 2165,1157 2235.08,1157 C26.1@2265.08,1127 ; Y3.1 2275.08,1047.79 C26.1 ; C26.1@2275.08,1147.08 C26.1 ; R23.1@2430,1042 R23.1 2430,1176 2380,1226 2312,1226 2275.08,1189.08 C26.1
pads on no net: DRILL1.1 DRILL2.1 DRILL3.1 DRILL4.1 E1.2 MARK1.1 MARK2.1 P1.5 P1.6 P1.8 P1.9 P1.10 U1.2 U1.3 U1.4 U1.9 U1.11 U1.12 U1.13 U1.36 U1.37 U3.7 U3.12 U3.13 U3.18 U3.46 U3.47 U3.49 U4.0 U4.7
copper on no net:
  other v1: 939.8,673.2 1014.6,673.2 1909.7,840.9 1223.3,973.6 3423.1,1006.9 1218.5,1039.9 762.5,1120.7 880.7,1143.6 1257.1,1229.3 3149,1754.2 1207,1769.7 2083.6,2005 1956.9,2087.8

## Polygon pours and split planes (outlines as drawn)
GND on Top Layer "Top Layer-No Net" (solid, remove dead copper, pour order 1000): 0,2338 0,0 3832.2,0 3832.2,1628.9 3780.1,1628.9 3778.3,1627.1 3778.3,1471.7 3778.3,1452.3 3808.4,1422.2 3806.6,1420.4 3806.6,1385.1 3806.6,1351.6 3568.2,1113.2 3561.1,1106.1 3488.7,1106.1 3488.7,1314.6 3490.4,1316.3 3663,1488.9 3663.1,1488.9 3663.1,1633.5 3661.8,1634.8 3660.5,1633.5 3590.2,1633.5 3590.2,2345.6 3588.8,2347
GND on Bottom Layer "Top Layer-No Net" (solid, remove dead copper, pour order 1001): 9,2347 0,2338 0,15.9 3827.2,15.9 3832.2,20.9 3832.2,1628.6 3779.8,1628.6 3778.5,1627.3 3779.8,1626 3779.8,1450.9 3806.4,1424.3 3806.4,1350.8 3805,1350.8 3559.9,1105.7 3487.7,1105.7 3487.7,1312.8 3487.1,1313.4 3660,1486.3 3660,1508.8 3660,1633.4 3660.7,1634.1 3589.9,1634.1 3589.9,2347

## Keep-outs
Keep-Out Layer:
  the board outline again, w4

## Silkscreen, mask and mechanical layers (free items; w line width, h text height)
Top Overlay:
  text "DGJ_control" at 2113.4,2213.8 h60
  text "+" at 12.8,1499 h100
Mechanical 1:
  lines w4: 0,0 3831.9,0 3831.9,2346.3 9.7,2346.3 1.4,2338 1.4,1.4 2.8,0
Mechanical 2:
  lines w10: -1,2337 9,2347

## Text inside footprints (layer, text, board x,y; h text height)
C31: Top Overlay "+" at 510,1261 h20 r180
C32: Top Overlay "+" at 820,1323 h20 r180
LED1: Top Overlay "+" at 2850,627 h15 r90
LED2: Top Overlay "+" at 2770,627 h15 r90
pwr_led: Top Overlay "-" at 115,1397 h20 r90; Top Overlay "+" at 113,1236 h20 r90